# Altium PCB Ethernet_Module.PcbDoc (part 2 of 2)
Units mm, origin at the board's own origin, x right, y up, seen from the top; angles counter-clockwise.
Board outline 42 x 21.99 mm, 4 copper layers (Top Layer, Int1 (GND), Int2 (PWR), Bottom Layer), stack 0.77 mm thick; 39 components, 59 nets, 215 pads, 61 vias.
Unrouted connection lines stored in the file: 3.
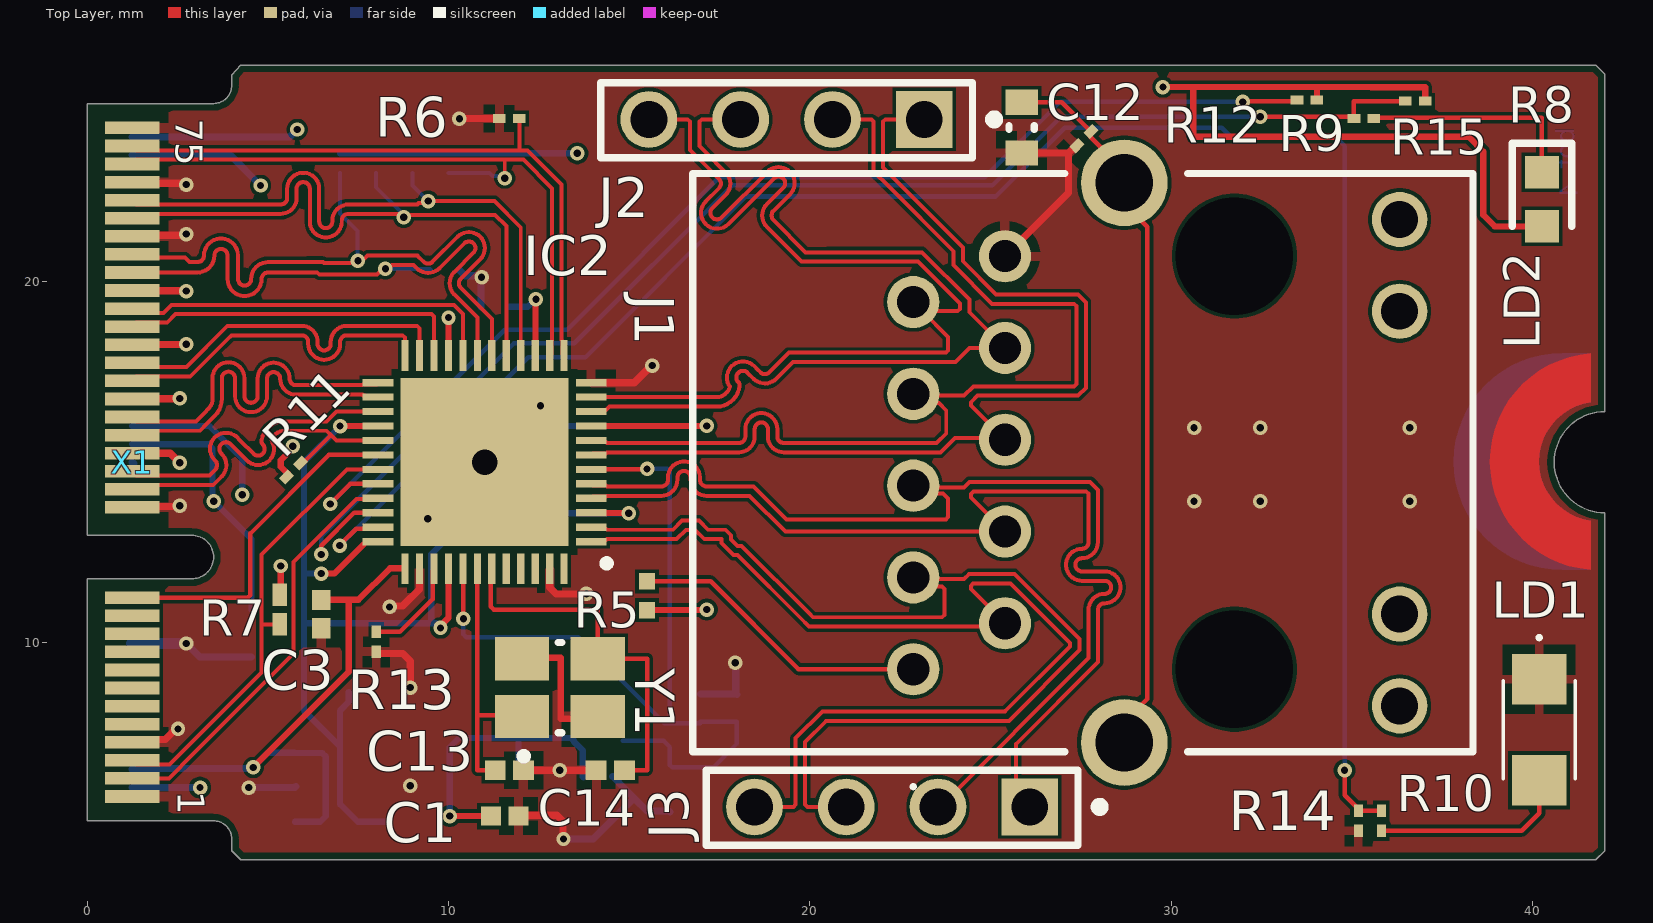
[diagram p0: Top Layer view]

## Other copper (continued)
Int2 (PWR) (plane layer: these items are gaps in the copper): (continued)
  lines w0.254: 3.124,13.64 3.404,13.64 4.775,12.268 4.775,9.906 5.563,9.119 7.01,9.119 8.131,10.24 11.811,13.919 17.628,19.736 17.628,24.155 15.265,24.155 12.751,24.155 12.751,23.216 12.751,21.895 11.963,21.107 11.151,21.107 9.322,19.279 6.502,19.279 6.502,16.374 6.375,16.247 6.375,14.754 5.348,13.726 4.955,14.119 4.955,14.476 4.819,14.612 3.512,14.612 3.277,14.376 3.124,14.224 3.124,13.64
  text "3" at 41.25,21.75 h0.5 r90

## Silkscreen, mask and mechanical layers (free items; w line width, h text height)
Top Solder:
  region: 41.795,11.991 cw(c41.795,14.991) 41.795,17.991
Bottom Solder:
  region: 40.796,11.991 cw(c40.796,14.991) 40.796,17.991 41.796,17.991 41.796,11.991
Mechanical 4:
  lines w0: 41.795,13.591 cw(c41.795,14.991) 40.396,14.991 cw(c41.796,14.991) 41.796,16.391 ; 42,13.6 42,4.25 41.75,4 4.25,4 4,4.25 4,4.575 ccw(c3.5,4.575) 3.5,5.075 0,5.075 0,11.775 2.9,11.775 ccw(c2.9,12.375) 3.5,12.375 ccw(c2.9,12.375) 2.9,12.975 0,12.975 0,24.925 3.5,24.925 ccw(c3.5,25.425) 4,25.425 4,25.713 4.25,25.988 41.75,25.988 42,25.738 42,16.4
Mechanical 6:
  lines w0.1: 29,4 29.75,4 30,4.25 ; 29,26 29.75,26 30,25.75 ; 29.75,0 30,0.25 30,4.25 ; 29.75,30 30,29.75 30,25.75 ; 42,13.6 42,4.25 ; 42,16.4 42,25.75 ; 4,4.25 4,0.25 4.25,0 41.75,0 42,0.25 42,4.25 ; 4,4.25 4,4.575 ccw(c3.5,4.575) 3.5,5.075 0,5.075 0,11.775 2.9,11.775 ccw(c2.9,12.375) 3.5,12.375 ccw(c2.9,12.375) 2.9,12.975 0,12.975 0,24.925 3.5,24.925 ccw(c3.5,25.425) 4,25.425 4,25.75 ; 4,4.25 4.25,4 5,4 41,4 41.75,4 42,4.25 ; 4,25.75 4,29.75 4.25,30 41.75,30 42,29.75 42,25.75 ; 4,25.75 4.25,26 5,26 41,26 41.75,26 42,25.75 ; 27,15 cw(c30,15) 30,18 ; 27,15 ccw(c30,15) 30,12 ; 27,15 27,15 ; 30,4.25 30,13.6 ; 30,12 30,13.6 ; 30,12 29,12 cw(c29,15) 26,15 cw(c29,15) 29,18 30,18 ; 30,13.6 cw(c30,15) 28.6,15 cw(c30,15) 30,16.4 ; 30,16.4 30,25.75 ; 30,16.4 30,18 ; 38.796,14.991 ccw(c41.796,14.991) 41.796,11.991 ; 38.796,14.991 cw(c41.796,14.991) 41.796,17.991 ; 38.796,14.991 38.796,14.991 ; 41.796,11.991 41.796,13.591 cw(c41.796,14.991) 40.396,14.991 cw(c41.796,14.991) 41.796,16.391 41.796,17.991 ; 41.796,11.991 40.796,11.991 cw(c40.796,14.991) 37.796,14.991 cw(c40.796,14.991) 40.796,17.991 41.796,17.991
  text "TYPE2230" at 21.35,4.35 h1
  text "TYPE2242" at 33.35,4.35 h1
  text "TYPE3030" at 21.35,0.35 h1
  text "TYPE3042" at 33.35,0.35 h1

## Text inside footprints (layer, text, board x,y; h text height)
X1: Top Overlay "1" at 2.515,5.893 h0.75 r270; Top Overlay "75" at 2.45,24.5 h0.75 r270; Mechanical 1 "Board Edge" at -1.65,19 h0.8 r270; Mechanical 1 "All pads hard gold finished" at 0.05,29.8 h0.5 r270; Mechanical 1 "20-degree chamfered border from this line" at -5.15,5 h0.5 r270; Mechanical 1 "Final Board Thickness: 0.8 +-0.08mm" at -3.85,24.3 h0.8 r270; Bottom Overlay "74" at 2.415,23.318 h0.75 r270; Bottom Overlay "2" at 2.515,5.512 h0.75 r270